# Altium PCB ECG.PcbDoc
Units mm, origin at the board's own origin, x right, y up, seen from the top; angles counter-clockwise.
Board outline 80 x 94 mm, 2 copper layers (Top Layer, Bottom Layer); 105 components, 52 nets, 276 pads, 39 vias.
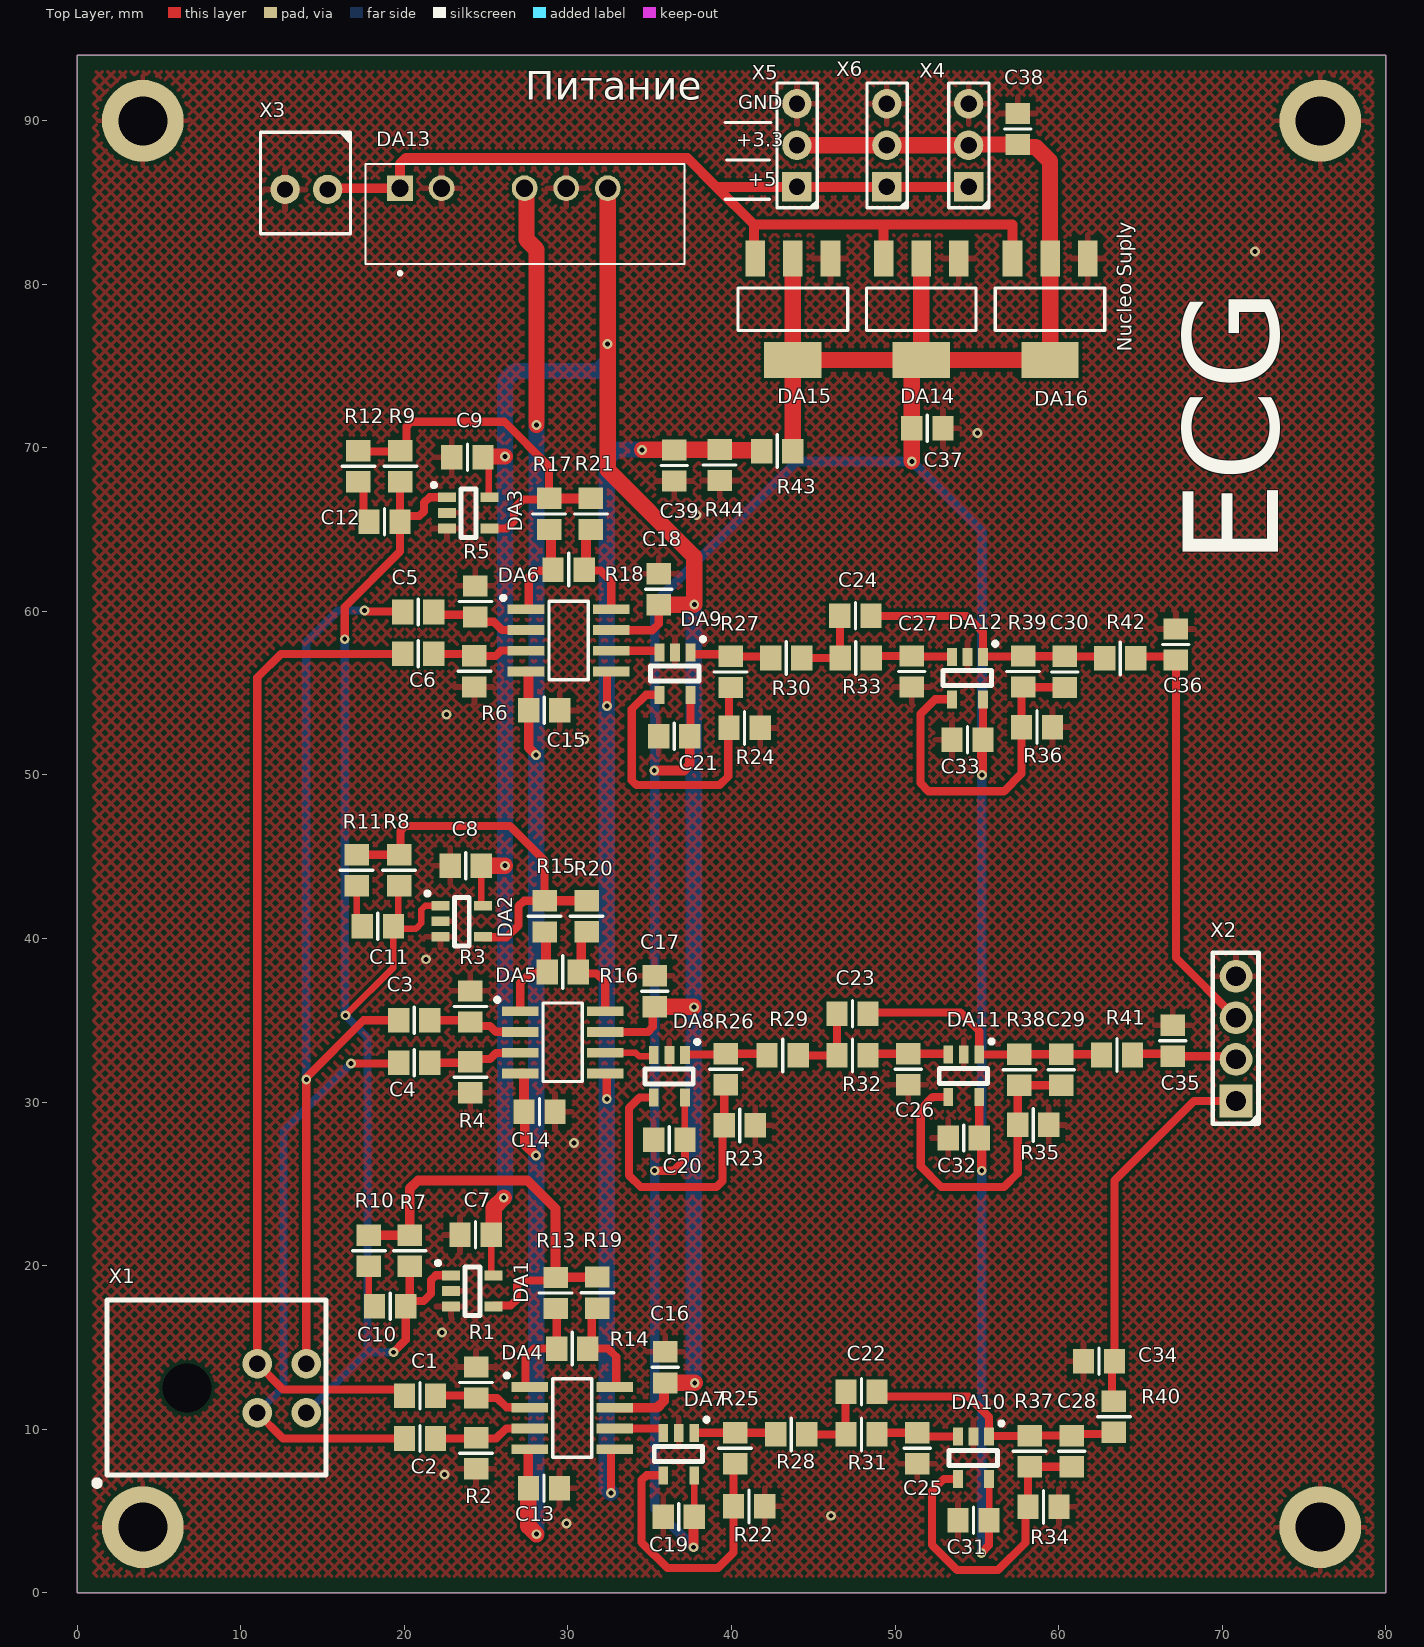
[diagram p0: Top Layer view]
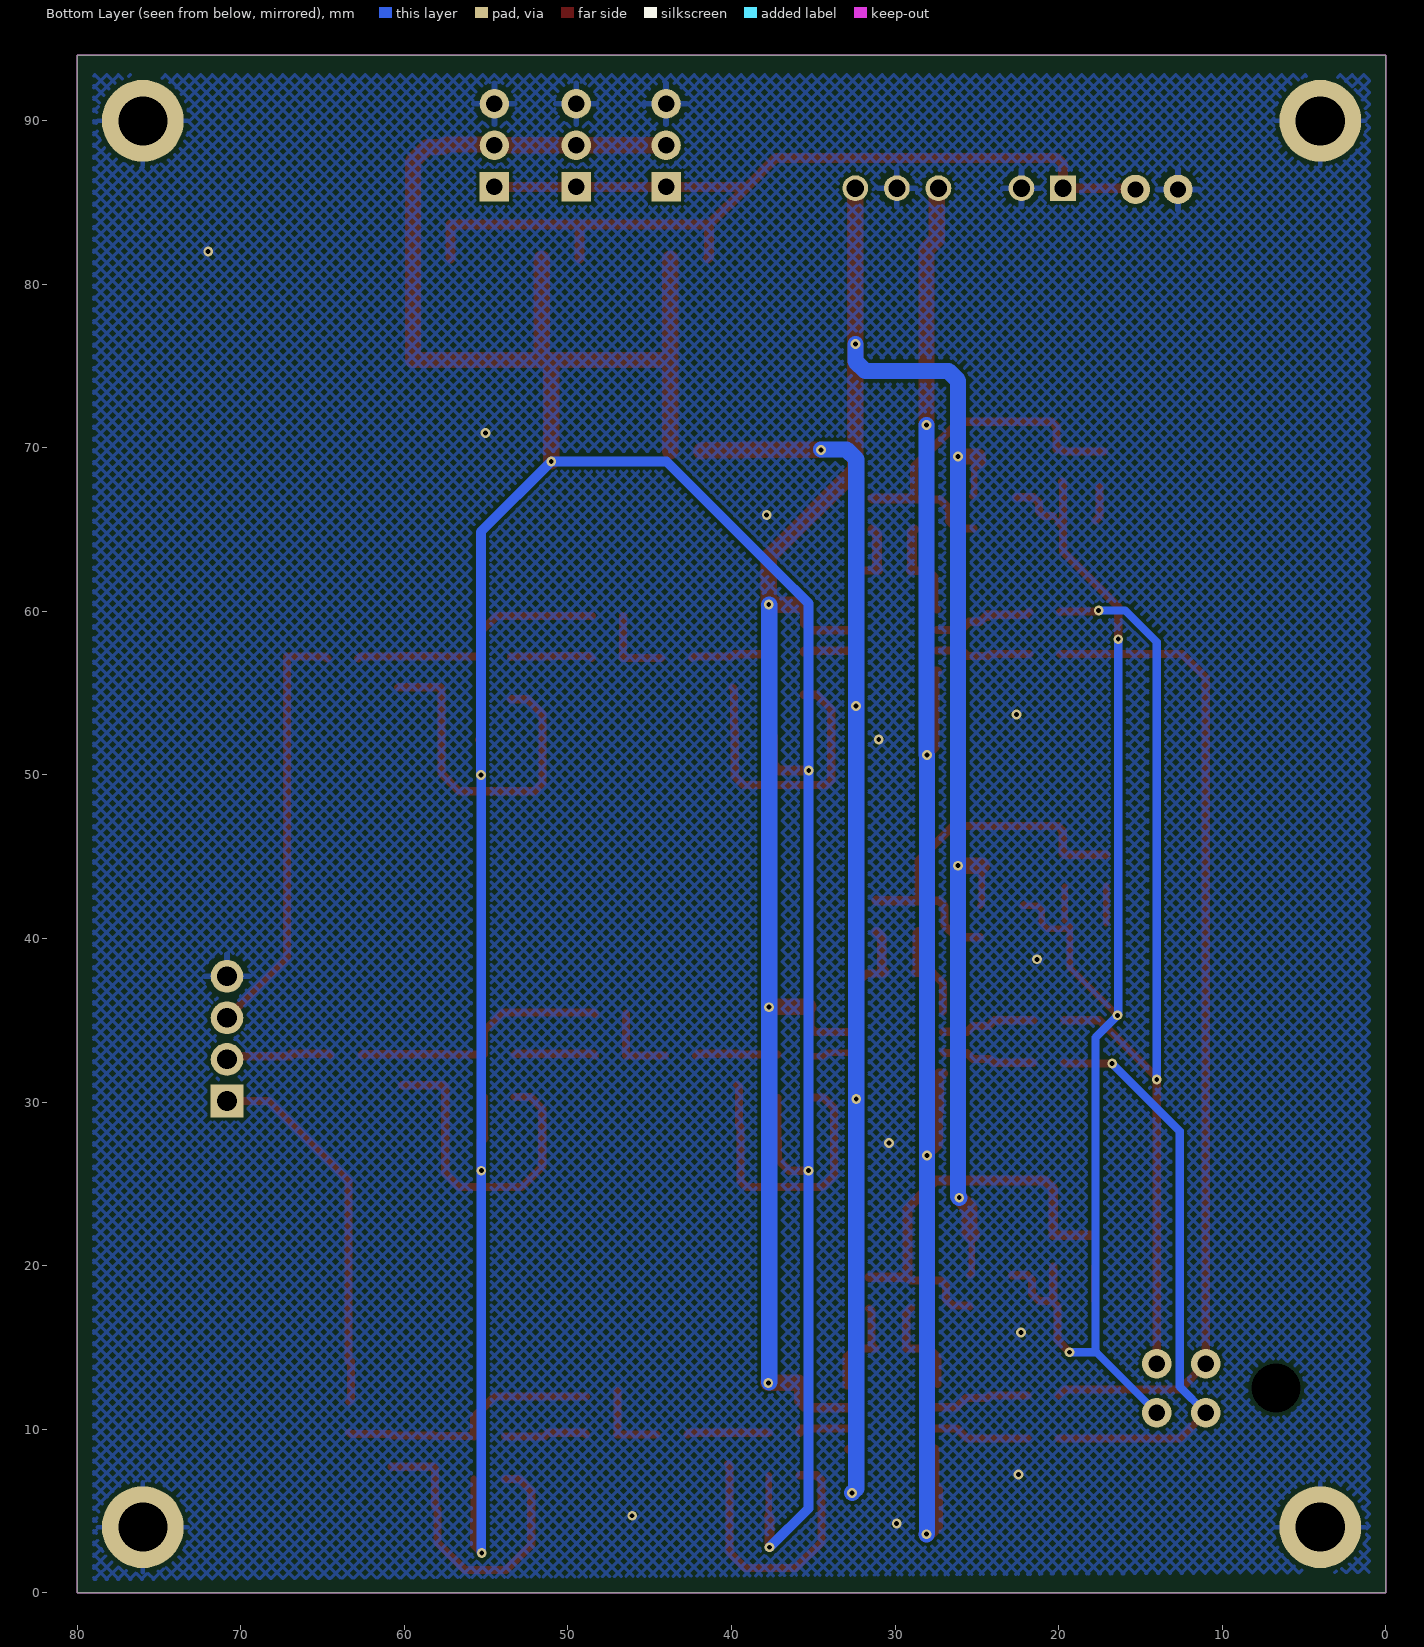
[diagram p1: Bottom Layer view, seen from below]

## Layer stack, top to bottom
Top Solder: solder mask 0.0102, Solder Resist, Dk 3.5
Top Layer: signal copper 0.0356
Dielectric 1: dielectric 0.32, FR-4, Dk 4.8
Bottom Layer: signal copper 0.0356
Bottom Solder: solder mask 0.0102, Solder Resist, Dk 3.5

## Board outline
0,94 80,94 80,0 0,0

## Design rules (kind name [scope] priority, off if disabled: settings)
AcuteAngle [All] p1: minimum=3.50000000000000E+0001 checktracksonly=FALSE
BoardOutlineClearance "BoardOutlineClearance 1" [All] p1: gap=0.25 ignorepadtopadclearanceinfootprint=FALSE except(0: Arc-SplitContinuation Track-SplitContinuation SMDPad-SplitContinuation THPad-SplitContinuation Via-SplitContinuation Fill-SplitContinuation Poly-SplitContinuation Region-SplitContinuation Text-SplitContinuation) // Milling
BoardOutlineClearance "BoardOutlineClearance 2" [All] p2: gap=0.4 ignorepadtopadclearanceinfootprint=FALSE except(0: Arc-SplitContinuation Track-SplitContinuation SMDPad-SplitContinuation THPad-SplitContinuation Via-SplitContinuation Fill-SplitContinuation Poly-SplitContinuation Region-SplitContinuation Text-SplitContinuation) // V-Cut
Clearance "Clearance 3 Oz" [All] p1: gap=0.1 ignorepadtopadclearanceinfootprint=FALSE except(0.2: Arc-Poly Track-Poly SMDPad-Poly THPad-Poly Via-Poly Fill-Poly; 0.35: Poly-Poly)
Clearance "Clearance 2 Oz" [All] p2: gap=0.1 ignorepadtopadclearanceinfootprint=FALSE except(0.2: Arc-Poly Track-Poly SMDPad-Poly THPad-Poly Via-Poly Fill-Poly; 0.35: Poly-Poly)
Clearance "Clearance-1 1 Oz" [All] p3: gap=0.2 ignorepadtopadclearanceinfootprint=FALSE except(0.25: Arc-Hole Track-Hole SMDPad-Hole THPad-Hole Via-Hole Fill-Hole Poly-Hole Region-Hole Text-Hole; 0.35: Poly-Poly) // Standart
Clearance "Clearance-2 1 Oz" [All] p4: gap=0.1 ignorepadtopadclearanceinfootprint=FALSE except(0.2: Arc-Poly Track-Poly SMDPad-Poly THPad-Poly Via-Poly Fill-Poly; 0.35: Poly-Poly) // Advance
Clearance "Clearance-1 1/2 Oz" [All] p5: gap=0.1 ignorepadtopadclearanceinfootprint=FALSE except(0.2: Arc-Poly Track-Poly SMDPad-Poly THPad-Poly Via-Poly Fill-Poly; 0.35: Poly-Poly) // Standart
Clearance "Clearance-2 1/2 Oz" [All] p6: gap=0.1 ignorepadtopadclearanceinfootprint=FALSE except(0.2: Arc-Poly Track-Poly SMDPad-Poly THPad-Poly Via-Poly Fill-Poly; 0.35: Poly-Poly) // Advance
DiffPairsRouting "DiffPairsRouting 1 Oz" [All] p1: maxlimit=0.254 minlimit=0.2 mostfreqgap=0.254 toplayer_minwidth=0.2 toplayer_maxwidth=0.381 toplayer_prefwidth=0.381 bottomlayer_minwidth=0.2 bottomlayer_maxwidth=0.381 bottomlayer_prefwidth=0.381 maxuncoupledlength=12.7
DiffPairsRouting "DiffPairsRouting 1/2 Oz" [All] p2: maxlimit=0.254 minlimit=0.1 mostfreqgap=0.254 toplayer_minwidth=0.1 toplayer_maxwidth=0.381 toplayer_prefwidth=0.381 bottomlayer_minwidth=0.1 bottomlayer_maxwidth=0.381 bottomlayer_prefwidth=0.381 maxuncoupledlength=12.7
HoleSize "Minimum HoleSize" [IsPad] p1: absolutevalues=TRUE maxlimit=5.9 minlimit=0.6 maxpercent=80.000 minpercent=20.000
HoleSize "Minimum HoleSize VIA 1" [IsVia] p2: absolutevalues=TRUE maxlimit=5.9 minlimit=0.3 maxpercent=80.000 minpercent=20.000 // Standart
HoleSize "Minimum HoleSize VIA 2" [IsVia] p3: absolutevalues=TRUE maxlimit=5.9 minlimit=0.2 maxpercent=80.000 minpercent=20.000 // Advance
HoleToHoleClearance Hole2HoleClearance [All] p1: gap=0.25 allowstackedmicrovias=FALSE
MinimumAnnularRing "Minimum AR VIA Standart" [IsVia] p1: minimumring=0.01
MinimumAnnularRing "Minimum AR PAD Standart" [IsPAD] p2: minimumring=0.01
MinimumAnnularRing "Minimum AR VIA Advance" [IsVia] p3: minimumring=0.01
MinimumAnnularRing "Minimum AR PAD Advance" [IsPAD] p4: minimumring=0.01
MinimumSolderMaskSliver "SolderMask Bridge Standart" [All] p1: minsoldermaskwidth=0.15 // All Masks
MinimumSolderMaskSliver "SolderMask Bridge Advance" [All] p2: minsoldermaskwidth=0.1 // Mask LDI
PlaneClearance "PlaneClearance 3 Oz" [All] p1: clearance=0.35
PlaneClearance "PlaneClearance 2 Oz" [All] p2: clearance=0.3
PlaneClearance "PlaneClearance 1 Oz" [All] p3: clearance=0.2
PlaneClearance "PlaneClearance-1 1/2 Oz" [All] p4: clearance=0.2 // Standart
PlaneClearance "PlaneClearance-2 1/2 Oz" [All] p5: clearance=0.15 // Advance
PlaneConnect "TermalConnect 3 Oz" [All] p1: planeconnectstyle=Relief reliefexpansion=0.2 reliefentries=4 reliefconductorwidth=0.35 reliefairgap=0.35 // Standart
PlaneConnect "TermalConnect 2 Oz" [All] p2: planeconnectstyle=Relief reliefexpansion=0.2 reliefentries=4 reliefconductorwidth=0.3 reliefairgap=0.3 // Standart
PlaneConnect "TermalConnect-1 1 Oz" [All] p3: planeconnectstyle=Relief reliefexpansion=0.2 reliefentries=4 reliefconductorwidth=0.2 reliefairgap=0.2 // Standart
PlaneConnect "TermalConnect-2 1 Oz" [All] p4: pad.planeconnectstyle=Relief pad.reliefexpansion=0.15 pad.reliefentries=4 pad.reliefconductorwidth=0.2 pad.reliefairgap=0.2 via.planeconnectstyle=Direct via.reliefexpansion=0.15 via.reliefentries=4 via.reliefconductorwidth=0.15 via.reliefairgap=0.15 // Advance
PlaneConnect "TermalConnect-1 1/2 Oz" [All] p5: planeconnectstyle=Relief reliefexpansion=0.2 reliefentries=4 reliefconductorwidth=0.2 reliefairgap=0.2 // Standart
PlaneConnect "TermalConnect-2 1/2 Oz" [All] p6: pad.planeconnectstyle=Relief pad.reliefexpansion=0.15 pad.reliefentries=4 pad.reliefconductorwidth=0.15 pad.reliefairgap=0.15 via.planeconnectstyle=Direct via.reliefexpansion=0.15 via.reliefentries=4 via.reliefconductorwidth=0.15 via.reliefairgap=0.15 // Advance
PolygonConnect "PolygonConnect 3 Oz" [All] p1: thpad.connectstyle=Relief thpad.reliefconductorwidth=0.35 thpad.reliefentries=4 thpad.polygonreliefangle="90 Angle" thpad.airgapwidth=0.35 smdpad.connectstyle=Relief smdpad.reliefconductorwidth=0.35 smdpad.reliefentries=4 smdpad.polygonreliefangle="90 Angle" smdpad.airgapwidth=0.35 via.connectstyle=Direct via.reliefconductorwidth=0.254 via.reliefentries=4 via.polygonreliefangle="90 Angle" via.airgapwidth=0.254
PolygonConnect "PolygonConnect 2 Oz" [All] p2: thpad.connectstyle=Relief thpad.reliefconductorwidth=0.3 thpad.reliefentries=4 thpad.polygonreliefangle="90 Angle" thpad.airgapwidth=0.3 smdpad.connectstyle=Relief smdpad.reliefconductorwidth=0.3 smdpad.reliefentries=4 smdpad.polygonreliefangle="90 Angle" smdpad.airgapwidth=0.3 via.connectstyle=Direct via.reliefconductorwidth=0.254 via.reliefentries=4 via.polygonreliefangle="90 Angle" via.airgapwidth=0.254
PolygonConnect "PolygonConnect-1 1 Oz" [All] p3: thpad.connectstyle=Relief thpad.reliefconductorwidth=0.2 thpad.reliefentries=4 thpad.polygonreliefangle="90 Angle" thpad.airgapwidth=0.2 smdpad.connectstyle=Relief smdpad.reliefconductorwidth=0.2 smdpad.reliefentries=4 smdpad.polygonreliefangle="90 Angle" smdpad.airgapwidth=0.2 via.connectstyle=Direct via.reliefconductorwidth=0.254 via.reliefentries=4 via.polygonreliefangle="90 Angle" via.airgapwidth=0.254 // Standart
PolygonConnect "PolygonConnect-2 1 Oz" [All] p4: thpad.connectstyle=Relief thpad.reliefconductorwidth=0.15 thpad.reliefentries=4 thpad.polygonreliefangle="90 Angle" thpad.airgapwidth=0.15 smdpad.connectstyle=Relief smdpad.reliefconductorwidth=0.15 smdpad.reliefentries=4 smdpad.polygonreliefangle="90 Angle" smdpad.airgapwidth=0.15 via.connectstyle=Direct via.reliefconductorwidth=0.254 via.reliefentries=4 via.polygonreliefangle="90 Angle" via.airgapwidth=0.254 // Advance
PolygonConnect "PolygonConnect-1 1/2 Oz" [All] p5: thpad.connectstyle=Relief thpad.reliefconductorwidth=0.15 thpad.reliefentries=4 thpad.polygonreliefangle="90 Angle" thpad.airgapwidth=0.2 smdpad.connectstyle=Relief smdpad.reliefconductorwidth=0.2 smdpad.reliefentries=4 smdpad.polygonreliefangle="90 Angle" smdpad.airgapwidth=0.2 via.connectstyle=Direct via.reliefconductorwidth=0.254 via.reliefentries=4 via.polygonreliefangle="90 Angle" via.airgapwidth=0.254 // Standart
PolygonConnect "PolygonConnect-2 1/2 Oz" [All] p6: thpad.connectstyle=Relief thpad.reliefconductorwidth=0.125 thpad.reliefentries=4 thpad.polygonreliefangle="90 Angle" thpad.airgapwidth=0.15 smdpad.connectstyle=Relief smdpad.reliefconductorwidth=0.125 smdpad.reliefentries=4 smdpad.polygonreliefangle="90 Angle" smdpad.airgapwidth=0.15 via.connectstyle=Direct via.reliefconductorwidth=0.254 via.reliefentries=4 via.polygonreliefangle="90 Angle" via.airgapwidth=0.254 // Advance
RoutingCorners [All] p1 off: cornerstyle=45-Degree minsetback=2.54 maxsetback=2.54
RoutingVias [All] p1: holewidth=0.3 width=0.6 viastyle="Through Hole" minholewidth=0.2 minwidth=0.4 maxholewidth=5.9 maxwidth=6.4
SilkToSilkClearance Silk2SilkClearance [All] p1 off: silktosilkclearance=0.15
SilkToSolderMaskClearance Silk2SolderMaskClearance [IsPad] p1 off: minsilkscreentomaskgap=0.15 clearancetoexposedcopper=TRUE
SolderMaskExpansion SolderMaskExpansion-1 [All] p1: expansion=0.05 istentingtop=FALSE // Standart
SolderMaskExpansion "SolderMaskExpansion LDI" [All] p2: expansion=0.025 istentingtop=FALSE // Advance
UnRoutedNet [All] p1: checkbadconnections=TRUE
Width "Width 3 Oz" [All] p1: maxlimit=10 minlimit=0.1 preferedwidth=0.4 checkconnectedcopper=TRUE
Width "Width 2 Oz" [All] p2: maxlimit=10 minlimit=0.1 preferedwidth=0.35 minimp=50.000000 maximp=50.000000 favimp=50.000000 checkconnectedcopper=TRUE
Width "Width 1 Oz" [All] p3: maxlimit=10 minlimit=0.1 preferedwidth=0.2 checkconnectedcopper=TRUE
Width "Width 1/2 Oz" [All] p4: maxlimit=10 minlimit=0.1 preferedwidth=0.125 checkconnectedcopper=TRUE
20 further rules are at their usual default settings.

## Classes and differential pairs
component class POWER: C37 C38 C39 DA13 DA14 DA15 DA16 R43 R44 X4 X5 X6
component class ECG_mesurment_2: C1 C2 C3 C4 C5 C6 C7 C8 C9 C10 C11 C12 C13 C14 C15 C16 C17 C18 C19 C20 C21 C22 C23 C24 C25 C26 C27 C28 C29 C30 C31 C32 C33 C34 C35 C36 DA1 DA2 DA3 DA4 DA5 DA6 DA7 DA8 DA9 DA10 DA11 DA12 R1 R2 R3 R4 R5 R6 R7 R8 R9 R10 R11 R12 R13 R14 R15 R16 R17 R18 R19 R20 R21 R22 R23 R24 R25 R26 R27 R28 R29 R30 R31 R32 R33 R34 R35 R36 R37 R38 R39 R40 R41 R42 X1 X2 X3

## Components (designator, comment, footprint, x,y, rotation, side; value= is the part's Value field where it differs from the comment)
C1 "0.1u" "CAP: SMD 0805 MD IPC 782" 20.95,12.051 r180 top
C2 "0.1u" "CAP: SMD 0805 MD IPC 782" 20.95,9.425 r180 top
C3 "0.1u" "CAP: SMD 0805 MD IPC 782" 20.603,34.999 r180 top
C4 "0.1u" "CAP: SMD 0805 MD IPC 782" 20.6,32.4 r180 top
C5 "0.1u" "CAP: SMD 0805 MD IPC 782" 20.847,59.962 r180 top
C6 "0.1u" "CAP: SMD 0805 MD IPC 782" 20.847,57.4 r180 top
C7 "0.1u 50V 0805 ±10%" "CAP: SMD 0805 MD IPC 782" 24.35,21.875 r180 top
C8 "0.1u 50V 0805 ±10%" "CAP: SMD 0805 MD IPC 782" 23.75,44.45 r180 top
C9 "0.1u 50V 0805 ±10%" "CAP: SMD 0805 MD IPC 782" 23.85,69.425 r180 top
C10 "6.8n 50V 0805 ±5%" "CAP: SMD 0805 MD IPC 782" 19.125,17.5 r0 top
C11 "6.8n 50V 0805 ±5%" "CAP: SMD 0805 MD IPC 782" 18.375,40.75 r0 top
C12 "6.8n 50V 0805 ±5%" "CAP: SMD 0805 MD IPC 782" 18.777,65.477 r0 top
C13 "0.1u 50V 0805 ±10%" "CAP: SMD 0805 MD IPC 782" 28.53,6.374 r0 top
C14 "0.1u 50V 0805 ±10%" "CAP: SMD 0805 MD IPC 782" 28.261,29.403 r0 top
C15 "0.1u 50V 0805 ±10%" "CAP: SMD 0805 MD IPC 782" 28.543,53.944 r0 top
C16 "0.1u 50V 0805 ±10%" "CAP: SMD 0805 MD IPC 782" 35.943,13.775 r90 top
C17 "0.1u 50V 0805 ±10%" "CAP: SMD 0805 MD IPC 782" 35.297,36.778 r90 top
C18 "0.1u 50V 0805 ±10%" "CAP: SMD 0805 MD IPC 782" 35.55,61.35 r90 top
C19 "0.1u 50V 0805 ±10%" "CAP: SMD 0805 MD IPC 782" 36.775,4.65 r180 top
C20 "0.1u 50V 0805 ±10%" "CAP: SMD 0805 MD IPC 782" 36.2,27.7 r180 top
C21 "0.1u 50V 0805 ±10%" "CAP: SMD 0805 MD IPC 782" 36.5,52.375 r180 top
C22 "0.01u 50V 0805 ±5%" "CAP: SMD 0805 MD IPC 782" 47.95,12.275 r180 top
C23 "0.01u 50V 0805 ±5%" "CAP: SMD 0805 MD IPC 782" 47.4,35.4 r180 top
C24 "0.01u 50V 0805 ±5%" "CAP: SMD 0805 MD IPC 782" 47.575,59.725 r180 top
C25 "0.01u 50V 0805 ±5%" "CAP: SMD 0805 MD IPC 782" 51.35,8.825 r270 top
C26 "0.1u 50V 0805 ±10%" "CAP: SMD 0805 MD IPC 782" 50.8,32 r90 top
C27 "0.1u 50V 0805 ±10%" "CAP: SMD 0805 MD IPC 782" 51.025,56.325 r90 top
C28 "0.01u 50V 0805 ±5%" "CAP: SMD 0805 MD IPC 782" 60.8,8.65 r270 top
C29 "0.1u 50V 0805 ±10%" "CAP: SMD 0805 MD IPC 782" 60.15,31.975 r270 top
C30 "0.1u 50V 0805 ±10%" "CAP: SMD 0805 MD IPC 782" 60.375,56.3 r270 top
C31 "0.1u 50V 0805 ±10%" "CAP: SMD 0805 MD IPC 782" 54.8,4.425 r180 top
C32 "0.1u 50V 0805 ±10%" "CAP: SMD 0805 MD IPC 782" 54.2,27.8 r180 top
C33 "0.1u 50V 0805 ±10%" "CAP: SMD 0805 MD IPC 782" 54.425,52.15 r180 top
C34 "0.1u 50V 0805 ±10%" "CAP: SMD 0805 MD IPC 782" 62.475,14.15 r180 top
C35 "0.1u 50V 0805 ±10%" "CAP: SMD 0805 MD IPC 782" 66.975,33.75 r90 top
C36 "0.1u 50V 0805 ±10%" "CAP: SMD 0805 MD IPC 782" 67.175,57.975 r90 top
C37 "0.1u 50V 0805 ±10%" "CAP: SMD 0805 MD IPC 782" 51.975,71.2 r0 top
C38 "0.1u 50V 0805 ±10%" "CAP: SMD 0805 MD IPC 782" 57.5,89.5 r90 top
C39 "0.1u 50V 0805 ±10%" "CAP: SMD 0805 MD IPC 782" 36.5,68.925 r270 top
DA1 "OPA189IDBVR" "IC: SOT 23 5pin" 24.15,18.45 r0 top
DA2 "OPA189IDBVR" "IC: SOT 23 5pin" 23.5,41.05 r0 top
DA3 "OPA189IDBVR" "IC: SOT 23 5pin" 23.9,66.025 r0 top
DA4 "AD620" "IC: SOIC 8" 30.261,10.675 r0 top
DA5 "AD620" "IC: SOIC 8" 29.678,33.65 r0 top
DA6 "AD620" "IC: SOIC 8" 30.041,58.224 r0 top
DA7 "TLV9101" "IC: SOT 23 5pin" 36.775,8.475 r270 top
DA8 "TLV9101" "IC: SOT 23 5pin" 36.2,31.575 r270 top
DA9 "TLV9101" "IC: SOT 23 5pin" 36.55,56.2 r270 top
DA10 "TLV9101" "IC: SOT 23 5pin" 54.8,8.25 r270 top
DA11 "TLV9101" "IC: SOT 23 5pin" 54.2,31.6 r270 top
DA12 "TLV9101" "IC: SOT 23 5pin" 54.425,55.925 r270 top
DA13 "DPU01L-12" SIP-6 27.35,84.1 r0 top
DA14 "AMS 1117-3.3" "IC: SOT 223" 51.6,78.475 r270 top
DA15 "AMS 1117-3.3" "IC: SOT 223" 43.75,78.475 r270 top
DA16 "AMS 1117-3.3" "IC: SOT 223" 59.48,78.475 r270 top
R1 "75k ±1% 0805" "RES: SMD 0805 MD IPC 782" 24.381,12.853 r270 top
R2 "75k ±1% 0805" "RES: SMD 0805 MD IPC 782" 24.381,8.523 r90 top
R3 "75k ±1% 0805" "RES: SMD 0805 MD IPC 782" 24.031,35.846 r270 top
R4 "75k ±1% 0805" "RES: SMD 0805 MD IPC 782" 24.027,31.517 r90 top
R5 "75k ±1% 0805" "RES: SMD 0805 MD IPC 782" 24.337,60.61 r270 top
R6 "75k ±1% 0805" "RES: SMD 0805 MD IPC 782" 24.282,56.332 r90 top
R7 "1M ±1% 0805" "RES: SMD 0805 MD IPC 782" 20.325,20.9 r90 top
R8 "1M ±1% 0805" "RES: SMD 0805 MD IPC 782" 19.675,44.175 r90 top
R9 "1M ±1% 0805" "RES: SMD 0805 MD IPC 782" 19.75,68.875 r90 top
R10 "10k ±1% 0805" "RES: SMD 0805 MD IPC 782" 17.825,20.9 r90 top
R11 "10k ±1% 0805" "RES: SMD 0805 MD IPC 782" 17.075,44.175 r90 top
R12 "10k ±1% 0805" "RES: SMD 0805 MD IPC 782" 17.177,68.877 r90 top
R13 "20k ±1% 0805" "RES: SMD 0805 MD IPC 782" 29.238,18.32 r90 top
R14 "1k ±1% 0805" "RES: SMD 0805 MD IPC 782" 30.266,14.923 r0 top
R15 "20k ±1% 0805" "RES: SMD 0805 MD IPC 782" 28.566,41.352 r90 top
R16 "1k ±1% 0805" "RES: SMD 0805 MD IPC 782" 29.678,37.95 r0 top
R17 "20k ±1% 0805" "RES: SMD 0805 MD IPC 782" 28.846,65.962 r90 top
R18 "1k ±1% 0805" "RES: SMD 0805 MD IPC 782" 30.041,62.548 r0 top
R19 "20k ±1% 0805" "RES: SMD 0805 MD IPC 782" 31.8,18.344 r270 top
R20 "20k ±1% 0805" "RES: SMD 0805 MD IPC 782" 31.141,41.363 r270 top
R21 "20k ±1% 0805" "RES: SMD 0805 MD IPC 782" 31.394,65.962 r270 top
R22 "100k ±1% 0805" "RES: SMD 0805 MD IPC 782" 41.075,5.275 r0 top
R23 "100k ±1% 0805" "RES: SMD 0805 MD IPC 782" 40.5,28.575 r0 top
R24 "100k ±1% 0805" "RES: SMD 0805 MD IPC 782" 40.8,52.875 r0 top
R25 "100k ±1% 0805" "RES: SMD 0805 MD IPC 782" 40.225,8.825 r90 top
R26 "100k ±1% 0805" "RES: SMD 0805 MD IPC 782" 39.65,32 r90 top
R27 "100k ±1% 0805" "RES: SMD 0805 MD IPC 782" 39.95,56.3 r90 top
R28 "27k ±1% 0805" "RES: SMD 0805 MD IPC 782" 43.65,9.675 r0 top
R29 "27k ±1% 0805" "RES: SMD 0805 MD IPC 782" 43.125,32.85 r0 top
R30 "27k ±1% 0805" "RES: SMD 0805 MD IPC 782" 43.35,57.15 r0 top
R31 "27k ±1% 0805" "RES: SMD 0805 MD IPC 782" 47.95,9.675 r0 top
R32 "27k ±1% 0805" "RES: SMD 0805 MD IPC 782" 47.4,32.85 r0 top
R33 "27k ±1% 0805" "RES: SMD 0805 MD IPC 782" 47.6,57.15 r0 top
R34 "100k ±1% 0805" "RES: SMD 0805 MD IPC 782" 59.075,5.25 r0 top
R35 "100k ±1% 0805" "RES: SMD 0805 MD IPC 782" 58.45,28.6 r0 top
R36 "100k ±1% 0805" "RES: SMD 0805 MD IPC 782" 58.675,52.925 r0 top
R37 "10k ±1% 0805" "RES: SMD 0805 MD IPC 782" 58.225,8.65 r90 top
R38 "100k ±1% 0805" "RES: SMD 0805 MD IPC 782" 57.6,31.975 r90 top
R39 "100k ±1% 0805" "RES: SMD 0805 MD IPC 782" 57.825,56.325 r90 top
R40 "75k ±1% 0805" "RES: SMD 0805 MD IPC 782" 63.375,10.75 r90 top
R41 "75k ±1% 0805" "RES: SMD 0805 MD IPC 782" 63.575,32.875 r0 top
R42 "75k ±1% 0805" "RES: SMD 0805 MD IPC 782" 63.775,57.125 r0 top
R43 "1k ±1% 0805" "RES: SMD 0805 MD IPC 782" 42.8,69.8 r0 top
R44 "1k ±1% 0805" "RES: SMD 0805 MD IPC 782" 39.275,68.95 r90 top
X1 "Micro-Fit 3.0 43045-0401" "CON: 4pin Molex MicroFit 3.0 43045-0401" 7,12.5 r270 top
X2 "PLS-4" "CON: 4pin PLS-4" 70.85,33.875 r90 top
X3 "WF-2" "CON: 2pin wf-2" 14,86.3 r180 top
X4 "PLS-3" "CON: 3pin PLS-3" 54.5,88.5 r90 top
X5 "PLS-3" "CON: 3pin PLS-3" 44,88.5 r90 top
X6 "PLS-3" "CON: 3pin PLS-3" 49.5,88.5 r90 top

## Footprints (in the part's own frame and the unit in brackets; to place one, negate y for a bottom-side part, rotate by r counter-clockwise, add the part's x,y. Pads: shape width x height; smd on the part's side, far side on the other; paste and mask are expansions set on the pad)
"CAP: SMD 0805 MD IPC 782" [mm]
  rect 1.3x1.5 smd: 1(-0.95,0) 2(0.95,0)
  silkscreen extent 0,-0.8 0,0.8, body extent -1.4,-0.63 1.4,0.63, height 0.8
"CON: 2pin wf-2" [mm]
  round 1.8 hole 1: 1(-1.3,0.5) 2(1.3,0.5)
  silkscreen extent -2.7,-3 2.8,3.2, body extent -2.49,-2.8 2.59,3, height 11.56
"CON: 3pin PLS-3" [mm]
  rect 1.8x1.8 hole 1: 1(-2.54,0)
  round 1.8 hole 1: 2(0,0) 3(2.54,0)
  silkscreen extent -3.81,-1.24 3.81,1.22, body extent -3.81,-1.27 3.81,1.27, height 8.6
"CON: 4pin Molex MicroFit 3.0 43045-0401" [mm]
  round 1.8 hole 1: 1(1.5,4) 2(-1.5,4) 3(1.5,7) 4(-1.5,7)
  round 0 hole 3: ""(0,-0.3)
  silkscreen extent -5.4,-5.9 5.9,8.2, body extent -5.07,-4.95 5.07,7.29, height 8.83
"CON: 4pin PLS-4" [mm]
  rect 2x2 hole 1.2: 1(-3.81,0)
  round 2 hole 1.2: 2(-1.27,0) 3(1.27,0) 4(3.81,0)
  silkscreen extent -5.21,-1.39 5.25,1.42, body extent -5.08,-1.3 5.08,1.3, height 7.83
"IC: SOIC 8" [mm]
  rect 2.25x0.6 smd: 1(-2.6,1.905) 2(-2.6,0.635) 3(-2.6,-0.635) 4(-2.6,-1.905) 5(2.6,-1.905) 6(2.6,-0.635) 7(2.6,0.635) 8(2.6,1.905)
  silkscreen extent -4.1,-2.4 1.2,2.7, body extent -3.05,-2.45 2.95,2.45, height 1.75
"IC: SOT 23 5pin" [mm]
  rect 1.1x0.6 smd: 1(-1.3,0.95) 2(-1.3,0) 3(-1.3,-0.95) 4(1.3,-0.95) 5(1.3,0.95)
  silkscreen extent -2.2,-1.5 0.46,1.8, body extent -1.5,-1.5 1.5,1.5, height 1.3
"IC: SOT 223" [mm]
  rect 2.2x1.2 smd: 1(-3.1,2.3) 2(-3.1,0) 3(-3.1,-2.3)
  rect 2.2x3.5 smd: 4(3.1,0)
  silkscreen extent -1.3,-3.35 1.3,3.35, body extent -3.48,-3.25 3.48,3.25, height 1.9
"RES: SMD 0805 MD IPC 782" [mm]
  rect 1.3x1.5 smd: 1(-0.95,0) 2(0.95,0)
  silkscreen extent 0,-1 0,1, body extent -1.4,-0.62 1.4,0.63, height 0.8
SIP-6 [mm]
  rect 1.575x1.575 hole 1.05: 1(-7.62,1.778)
  round 1.575 hole 1.05: 2(-5.08,1.778) 4(0,1.778) 5(2.54,1.778) 6(5.08,1.778)
  silkscreen extent -9.72,-3.52 9.78,3.25

## Part data
C1 C2 C3 C4 C5 C6: library part "0.1u 50V 0805 ±10%", Code=6279254871, Name="Конденсатор X7R 50V 0,1uF ±10% 0805"
DA13: library part "DC-DC: +12/-12V DPU01L-12", Code=6339113551, Name="Микросхема AM2D-0512DZ, AIMTEC"
DA14 DA15 DA16: library part "LDO: 15-3.3V AMS1117", Code=6339112951, Name="Микросхема AMS-1117-3.3"
X1: library part "4 pin MicroFit DR R Molex"
X2: library part "4 pin PLS-4", Code=6313932041, Name="Вилка WF-4"
X3: library part "2 pin WF-2", Code=6313952902, Name="Вилка WF-2"
X4 X5 X6: library part "3 in PLS 3", Code=6313952321, Name="Вилка PLS-2"
C7 C8 C9 C13 C14 C15 C16 C17 C18 C19 C20 C21 C26 C27 C29 C30 C31 C32 C33 C34 C35 C36 C37 C38 C39: Code=6279254871, Name="Конденсатор X7R 50V 0,1uF ±10% 0805"
C10 C11 C12: Code=6279352311, Name="Конденсатор NPO 50V 6800pF ±5% 0805"
C22 C23 C24 C25 C28: Code=6279261451, Name="Конденсатор X7R 50V  0,01uF±5%  0805"
DA1 DA2 DA3: Name="Микросхема OPA189IDBVR"
DA7 DA8 DA9 DA10 DA11 DA12: Code=6339115821, Name="Микросхема TLV9101IDBVR"
R1 R2 R3 R4 R5 R6 R40 R41 R42: Name="Резистор 75К±1% 0805"
R7 R8 R9: Name="Резистор RC0805FR-071KL, Yageo"
R10 R11 R12 R37: Code=6020003061, Name="Резистор RC0805JR-0710KL"
R13 R15 R17 R19 R20 R21: Code=6094357581, Name="Резистор 20K±1% 0805"
R14 R16 R18 R43 R44: Code=6027158691, Name="Резистор RC0805FR-071KL, Yageo"
R22 R23 R24 R25 R26 R27 R34 R35 R36 R38 R39: Code=6094357811, Name="Резистор 100K±1% 0805"
R28 R29 R30 R31 R32 R33: Name="Резистор 27k±1% 0805"

## Free pads (board coordinates)
  round 5 hole 3: 3(4,4) 3(4,90) 3(76,4) 3(76,90)

## Via types
v1: diameter 0.6, hole 0.3, Top Layer to Bottom Layer, 39 vias

## Nets (pads, with @x,y where several pads share a name; then routed paths per layer and width w, separated by ;. In a path a pad name is that pad's centre, name@x,y a point inside that pad or via, vN(x,y) a via of type N, cw(c..) or ccw(c..) an arc to the next point about the centre after c; other vN are vias at no path point)
+3.3: C19.1 C20.1 C21.1 C31.1 C32.1 C33.1 C37.1 C38.1 DA7.5 DA8.5 DA9.5 DA10.5 DA11.5 DA12.5 DA14.2 DA14.4 DA15.2 DA15.4 DA16.2 DA16.4 R43.2 X4.2 X5.2 X6.2 | length 245.3
  Top Layer w0.4: C20.1 DA8.5 ; C19.1 DA7.5 ; C31.1 DA10.5
  Top Layer w0.5: v1(35.3,25.8) 36.475,25.8 37.15,26.475 C20.1 ; C21.1 37.5,52.425 DA9.5 ; C32.1 DA11.5 ; v1(55.275,2.425) 55.75,2.9 C31.1 ; C33.1 DA12.5
  Top Layer w0.6: v1(35.275,50.275) 37.099,50.275 37.45,50.626 C21.1 ; v1(37.675,2.775) 37.675,4.6 C19.1 ; C32.1 55.3,27.65 v1(55.3,25.8) ; v1(55.325,50) 55.325,52.1 C33.1
  Top Layer w1: R43.2 DA15.4 ; DA15.2 DA15.4 ; X5.2 X6.2 X4.2 ; v1(51.025,69.175) C37.1 DA14.4@51.025,75.375 ; DA14.2 DA14.4 ; X4.2@54.5,88.55 C38.1 ; C38.1@57.5,88.552 57.652,88.4 58.6,88.4 59.473,87.527 DA16.2@59.473,81.615 ; DA16.2 DA16.4 DA14.4 ; DA15.4 DA14.4@51.025,75.375 ; DA14.4@51.025,75.375 DA14.4
  Bottom Layer w0.6: v1(37.675,2.775) 35.3,5.15 v1(35.3,25.8) 35.3,60.5 37.15,62.35 43.975,69.175 v1(51.025,69.175) 55.325,64.875 v1(55.325,50) 55.3,49.975 v1@55.3,2.487
+5: DA13.1 DA14.3 DA15.3 DA16.3 X3.1 X4.1 X5.1 X6.1 | length 66.8
  Top Layer w0.6: X3.1@15.25,85.878 DA13.1 19.73,87.374 20.081,87.725 37.3,87.725 39.065,85.96 ; DA15.3 41.375,81.65 41.375,83.65 ; DA14.3 49.3,83.65 ; X4.1 X5.1 39.065,85.96 ; DA16.3 57.18,83.55 ; 57.18,83.65 49.3,83.65 ; 39.065,85.96 41.375,83.65 ; 41.375,83.65 49.3,83.65
+12: C7.1 C8.1 C9.1 C16.1 C17.1 C18.1 DA1.5 DA2.5 DA3.5 DA4.7 DA5.7 DA6.7 DA13.6 | length 165
  Top Layer w0.4: C8.1 24.7,42.1 DA2.5 ; C9.1@25.148,69.2 25.148,67.152 25.248,67.052 DA3.5@25.277,67.052 ; C7.1 25.3,19.5 25.4,19.4 DA1.5
  Top Layer w0.5: DA5.7 34.892,34.285 35.185,34.578 C17.1@35.185,35.716 ; DA6.7@32.65,58.85 35.175,58.85 35.55,59.225 C18.1
  Top Layer w0.6: DA4.7@32.864,11.31 33.861,11.31 33.865,11.307 35.459,11.307 35.869,11.717 C16.1@35.869,12.788
  Top Layer w1: C8.1 v1(26.15,44.45) ; C9.1@24.95,69.2 24.95,69.475 v1(26.15,69.475) ; C7.1 25.45,22.025 25.45,23.525 v1(26.075,24.15) ; DA13.6@32.425,85.986 v1(32.425,76.35) 32.425,68.65 37.725,63.35 v1(37.725,60.425) 37.7,60.4 C18.1 ; C17.1 v1@37.672,35.828 ; C16.1@35.869,12.788 35.906,12.825 v1(37.75,12.825)
  Bottom Layer w1: v1(26.075,24.15) 26.15,24.225 v1(26.15,44.45) v1(26.15,69.475) 26.15,74.114 26.736,74.7 31.831,74.7 32.417,75.286 v1@32.417,76.342 ; v1@37.7,12.875 v1@37.7,60.4
  other v1: 37.7,35.8
-12: C13.1 C14.1 C15.1 DA4.4 DA5.4 DA6.4 DA13.4 | length 99
  Top Layer w0.6: DA5.4 27.311,31.745 C14.1 27.355,29.358 27.355,27.42 v1(28.05,26.725) ; DA6.4 27.593,56.319 C15.1 27.597,53.94 27.597,51.678 v1(28.05,51.225) ; C13.1@27.573,6.382 27.573,8.77 DA4.4
  Top Layer w1: DA13.4 27.46,85.768 27.46,82.74 28.075,82.125 v1(28.075,71.4) ; C13.1@27.58,6.305 27.58,4.07 v1(28.075,3.575)
  Bottom Layer w1: v1(28.05,51.225) 28.05,3.6 v1(28.075,3.575) ; v1@28.075,51.25 v1(28.075,71.4)
GND: C7.2 C8.2 C9.2 C13.2 C14.2 C15.2 C16.2 C17.2 C18.2 C19.2 C20.2 C21.2 C25.2 C26.1 C27.1 C31.2 C32.2 C33.2 C34.2 C35.2 C36.2 C37.2 C38.2 C39.2 DA1.2 DA1.3 DA2.2 DA2.3 DA3.2 DA3.3 DA7.2 DA8.2 DA9.2 DA10.2 DA11.2 DA12.2 DA13.2 DA13.5 DA14.1 DA15.1 DA16.1 pad.3 R1.1 R2.1 R3.1 R4.1 R5.1 R6.1 R22.2 R23.2 R24.2 R34.2 R35.2 R36.2 R44.1 X2.4 X3.2 X4.3 X5.3 X6.3
  other v1: 29.9,4.225 46.075,4.7 22.45,7.225 22.3,15.9 30.375,27.5 21.325,38.725 31,52.175 22.575,53.7 37.85,65.9 55.05,70.9 72,82
LA: C1.2 C6.2 X1.2 | length 61.3
  Top Layer w0.5: C6.2 12.45,57.4 11,55.95 X1.2 12.575,12.425 19.626,12.425 C1.2
LL: C3.2 C5.2 X1.4 | length 58.1
  Top Layer w0.5: X1.4 14,31.5 17.5,35 19.652,35 C3.2 ; v1(17.55,60.05) 17.577,60.05 17.627,60 19.859,60 C5.2
  Bottom Layer w0.5: v1(14,31.375) 14,58.125 15.925,60.05 v1(17.55,60.05)
NetC1_1: C1.1 DA4.2 R1.2 | length 5.9
  Top Layer w0.5: C1.1 R1.2@24.232,12.051 ; R1.2 25.666,11.903 26.233,11.336 27.635,11.336 DA4.2
NetC2_1: C2.1 DA4.3 R2.2 | length 8.4
  Top Layer w0.5: R2.2@24.333,9.425 C2.1 25.61,9.425 26.225,10.04 DA4.3
NetC3_1: C3.1 DA5.2 R3.2 | length 5.8
  Top Layer w0.3: R3.2@23.927,34.999 R3.2
  Top Layer w0.5: C3.1 R3.2@23.927,34.999 ; R3.2 24.273,34.654 25.238,34.654 25.599,34.292 27.07,34.292 DA5.2
NetC4_1: C4.1 DA5.3 R4.2 | length 5.8
  Top Layer w0.3: R4.2@23.96,32.4 R4.2
  Top Layer w0.5: C4.1 R4.2@23.96,32.4 ; R4.2 24.195,32.634 25.234,32.634 25.603,33.003 26.997,33.003 DA5.3@27.043,33.049
NetC5_1: C5.1 DA6.2 R5.2 | length 6.2
  Top Layer w0.5: C5.1 21.959,59.8 24.15,59.8 R5.2@24.3,59.65 ; R5.2@24.347,59.85 24.347,59.815 24.8,59.362 25.473,59.362 25.966,58.869 27.431,58.869 DA6.2
NetC6_1: C6.1 DA6.3 R6.2 | length 5.8
  Top Layer w0.3: R6.2@24.164,57.4 R6.2 ; DA6.3@27.43,57.6 DA6.3
  Top Layer w0.5: C6.1 R6.2@24.164,57.4 ; R6.2 25.582,57.282 25.9,57.6 DA6.3@27.43,57.6
NetC10_1: C10.1 R10.1 | length 2.1
  Top Layer w0.4: C10.1@17.825,17.85 R10.1
NetC11_1: C11.1 R11.1 | length 2.3
  Top Layer w0.4: C11.1@17.075,40.925 R11.1
NetC12_1: C12.1 R12.1 | length 2.2
  Top Layer w0.5: R12.1@17.5,67.605 17.5,65.805 C12.1@17.75,65.555
NetC22_1: C22.1 C28.1 DA10.1 R37.2 R40.1 | length 16.4
  Top Layer w0.5: C22.1@48.9,12 54.5,12 55.75,10.75 DA10.1 55.775,9.575 58.2,9.575 R37.2 ; R37.2@58.275,9.65 R37.2 ; R40.1 63.275,9.7 60.9,9.7 C28.1 R37.2
NetC22_2: C22.2 R28.2 R31.1 | length 5.1
  Top Layer w0.5: R28.2 R31.1 46.962,9.713 C22.2@46.962,12.312
NetC23_1: C23.1 C29.1 DA11.1 R38.2 R41.1 | length 16.2
  Top Layer w0.5: C23.1 48.425,35.475 54,35.475 55.15,34.325 DA11.1 55.162,32.913 57.587,32.913 R38.2 C29.1 62.575,32.925 R41.1
NetC23_2: C23.2 R29.2 R32.1 | length 4.9
  Top Layer w0.5: R29.2 R32.1 C23.2
NetC24_1: C24.1 C30.1 DA12.1 R39.2 R42.1 | length 16.3
  Top Layer w0.5: C24.1 54.375,59.725 55.375,58.725 DA12.1 55.4,57.25 57.8,57.25 R39.2 57.837,57.262 60.362,57.262 C30.1 62.7,57.25 R42.1
NetC24_2: C24.2 R30.2 R33.1 | length 4.9
  Top Layer w0.5: R30.2 R33.1 46.637,57.162 46.637,59.712 C24.2
NetC25_1: C25.1 DA10.3 R31.2 | length 5.1
  Top Layer w0.5: R31.2 49,9.775 51.225,9.775 51.45,9.55 DA10.3
NetC26_2: C26.2 DA11.3 R32.2 | length 5
  Top Layer w0.5: R32.2 48.45,32.95 C26.2 53.2,32.95 DA11.3
NetC27_2: C27.2 DA12.3 R33.2 | length 5
  Top Layer w0.5: R33.2 48.675,57.275 C27.2 51.05,57.25 53.45,57.25 DA12.3
NetC28_2: C28.2 DA10.4 R34.1 R37.1 | length 19.6
  Top Layer w0.5: DA10.4 52.975,6.95 52.25,6.225 52.25,2.925 53.8,1.375 56.3,1.375 57.975,3.05 57.975,5.1 R34.1 58.125,7.6 R37.1 C28.2
NetC29_2: C29.2 DA11.4 R35.1 R38.1 | length 20.3
  Top Layer w0.5: DA11.4 52.3,30.3 51.575,29.575 51.575,26.05 52.825,24.8 56.657,24.8 57.5,25.643 R35.1 57.5,30.925 R38.1 C29.2
NetC30_2: C30.2 DA12.4 R36.1 R39.1 | length 21.3
  Top Layer w0.5: DA12.4 52.45,54.625 51.55,53.725 51.55,49.5 52.05,49 56.65,49 57.725,50.075 R36.1 57.725,55.275 R39.1 57.837,55.362 60.362,55.362 C30.2
NetC34_1: C34.1 R40.2 X2.1 | length 23
  Top Layer w0.5: C34.1@63.275,14.15 63.275,11.8 R40.2 ; C34.1 63.425,25.2 68.29,30.065 X2.1
NetC35_1: C35.1 R41.2 X2.2 | length 6.6
  Top Layer w0.5: R41.2 64.6,32.95 C35.1@66.975,32.95 ; C35.1 X2.2@71.05,32.8
NetC36_1: C36.1 R42.2 X2.3 | length 25.9
  Top Layer w0.5: R42.2 64.85,57.25 C36.1@67.175,57.25 ; C36.1 67.175,38.82 X2.3
NetDA1_4: DA1.4 R7.2 R10.2 R13.2 R19.1 | length 26.8
  Top Layer w0.5: DA1.4 25.5,17.55 26.5,17.55 26.883,17.933 26.883,18.788 27.176,19.081 29.05,19.081 R13.2
  Top Layer w0.6: R10.2 R7.2 20.325,24.703 20.826,25.204 27.521,25.204 29.238,23.487 R13.2@29.238,19.29 ; R13.2 R13.2@29.238,19.29 ; R19.1@31.58,19.282 31.572,19.29 R13.2@29.238,19.29
NetDA2_4: DA2.4 R8.2 R11.2 R15.2 R20.1 | length 24.3
  Top Layer w0.5: R11.2 R8.2 19.75,45.2 19.75,46.582 20.043,46.875 26.45,46.875 28.566,44.759 R15.2 27.302,42.302 26.975,41.975 26.975,40.8 26.25,40.075 24.825,40.075 DA2.4
  Top Layer w0.6: R15.2@28.632,42.308 31.135,42.308 R20.1
NetDA3_4: DA3.4 R9.2 R12.2 R17.2 R21.1 | length 23.2
  Top Layer w0.5: R12.2@17.23,69.775 R9.2@19.57,69.775 ; R9.2@19.777,69.827 R9.2@19.85,69.9 ; R9.2@20.125,69.9 20.125,71.307 20.418,71.6 26.103,71.6 28.846,68.857 R17.2 28.784,66.85 27.25,66.85 26.7,66.3 26.7,65.525 26.25,65.075 DA3.4
  Top Layer w0.6: R17.2 R21.1
NetDA4_1: DA4.1 R13.1 R14.1 | length 6.4
  Top Layer w0.5: DA4.1@27.397,12.753 27.397,14.397 27.923,14.923 R14.1 29.316,17.101 R13.1@29.019,17.398
NetDA4_6: DA4.6 DA7.3 | length 3.2
  Top Layer w0.5: DA4.6 35.775,10.04 35.825,9.99 DA7.3
NetDA4_8: DA4.8 R14.2 R19.2 | length 6.3
  Top Layer w0.5: R19.2@31.58,17.382 31.45,17.252 31.45,15.157 R14.2 31.45,14.923 32.452,14.923 32.95,14.425 DA4.8@32.95,12.669
NetDA5_1: DA5.1 R15.1 R16.1 | length 6.2
  Top Layer w0.5: DA5.1 27.078,37.278 27.7,37.9 28.677,37.9 R16.1
  Top Layer w0.6: R15.1 28.647,40.322 28.647,38.031 R16.1
NetDA5_6: DA5.6 DA8.3 | length 3.1
  Top Layer w0.4: DA5.6 34.135,33.015 34.35,32.8 35.175,32.8 DA8.3
NetDA5_8: DA5.8 R16.2 R20.2 | length 6.4
  Top Layer w0.5: R16.2 30.713,37.865 31.735,37.865 32.278,37.322 DA5.8
  Top Layer w0.6: R16.2 30.817,38.139 30.817,40.089 R20.2
NetDA6_1: DA6.1 R17.1 R18.1 | length 6.3
  Top Layer w0.5: DA6.1 27.491,60.179 27.6,60.179 27.6,62.1 27.984,62.484 R18.1@29.027,62.484
  Top Layer w0.6: R17.1 28.968,64.89 28.968,62.542 R18.1@29.027,62.484
NetDA6_6: DA6.6 DA9.3 | length 3
  Top Layer w0.5: DA6.6 35.55,57.589 35.6,57.539 DA9.3
NetDA6_8: DA6.8 R18.2 R21.2 | length 6.3
  Top Layer w0.5: R18.2@31.023,62.516 31.039,62.5 32,62.5 32.641,61.859 DA6.8
  Top Layer w0.6: R18.2@31.023,62.516 31.107,62.6 31.107,64.725 R21.2
NetDA7_1: DA7.1 R25.2 R28.1 | length 5
  Top Layer w0.5: DA7.1 R25.2 42.6,9.775 R28.1
NetDA7_4: DA7.4 R22.1 R25.1 | length 17.4
  Top Layer w0.5: DA7.4 34.793,7.175 34.5,6.882 34.5,3.075 36.075,1.5 39.175,1.5 40.125,2.45 R22.1 40.125,7.775 R25.1
NetDA8_1: DA8.1 R26.2 R29.1 | length 5
  Top Layer w0.5: DA8.1@37.187,32.913 39.612,32.913 R26.2 42.075,32.95 R29.1
NetDA8_4: DA8.4 R23.1 R26.1 | length 18
  Top Layer w0.5: DA8.4 34.375,30.275 33.732,29.632 33.732,25.518 34.45,24.8 39.075,24.8 39.45,25.175 39.45,28.475 R23.1 39.55,30.95 R26.1
NetDA9_1: DA9.1 R27.2 R30.1 | length 5.1
  Top Layer w0.5: DA9.1 37.5,57.425 37.55,57.375 39.825,57.375 R27.2 42.3,57.25 R30.1
NetDA9_4: DA9.4 R24.1 R27.1 | length 18.2
  Top Layer w0.5: DA9.4 34.775,54.9 33.9,54.025 33.9,49.668 34.193,49.375 39.275,49.375 39.8,49.9 39.8,52.825 R24.1 39.85,55.25 R27.1
RA: C2.2 C4.2 X1.1 | length 36.3
  Top Layer w0.5: X1.1 12.575,9.425 C2.2 ; v1(16.725,32.35) 19.6,32.35 C4.2
  Bottom Layer w0.5: X1.1 12.596,12.596 12.596,28.221 v1(16.725,32.35)
"REF +1.65": C39.1 DA4.5 DA5.5 DA6.5 R43.1 R44.2 | length 79.9
  Top Layer w0.5: DA5.5 32.325,31.745 32.375,31.695 v1(32.375,30.177) ; v1(32.381,54.217) 32.381,56.269 32.431,56.319 DA6.5 ; v1(32.625,6.1) 32.625,8.72 32.675,8.77 DA4.5
  Top Layer w1: v1(34.525,69.875) C39.1 36.513,69.888 39.262,69.888 R44.2 39.325,69.85 41.8,69.85 R43.1
  Bottom Layer w1: v1@32.375,54.211 v1(32.375,30.177) 32.375,7.895 32.375,6.35 v1(32.625,6.1) ; v1(32.381,54.217) 32.381,69.314 32.967,69.9 v1@34.525,69.9
RL: C10.2 C11.2 C12.2 DA1.1 DA2.1 DA3.1 R7.1 R8.1 R9.1 X1.3 | length 87.3
  Top Layer w0.4: v1(16.4,35.3) 19.325,38.225 C11.2@19.325,40.6 ; C11.2 19.475,40.6 20.7,40.6 21.025,40.925 21.025,41.75 21.275,42 DA2.1 DA2.1@22.1,42.1 ; C11.2@19.625,41.125 R8.1@19.625,43.175
  Top Layer w0.5: v1(16.35,58.3) 16.35,60.276 19.727,63.653 19.727,65.202 C12.2@20.002,65.477 ; v1(19.325,14.7) 20.075,15.45 C10.2 C10.2@20.325,17.75 ; C12.2 19.727,67.877 R9.1@19.777,67.927 ; R7.1 C10.2@20.325,17.75 ; C12.2@20.35,65.825 20.907,65.825 21.2,66.118 21.2,66.65 21.525,66.975 DA3.1 ; DA1.1@22.841,19.409 21.918,19.409 21.625,19.116 21.625,18.275 21.182,17.832 20.407,17.832 C10.2@20.325,17.75
  Bottom Layer w0.5: X1.3 17.7,14.7 ; v1@16.35,58.273 16.35,35.377 16.4,35.327 v1(16.4,35.3) 17.75,33.95 17.75,14.75 17.7,14.7 ; v1(19.325,14.7) 17.7,14.7
pads on no net: X1.

## Polygon pours and split planes (outlines as drawn)
GND on Bottom Layer "NONET_L-01_P-001" (hatched 45Degree grid 0.508 track 0.203, pour order 3): 1,92.814 79,92.814 79,0.804 1,1.248
GND on Top Layer "NONET_L-01_P-001" (hatched 45Degree grid 0.508 track 0.203, pour order 2): 1,93 79.2,93 79.2,1 1,1

## Keep-outs
Keep-Out Layer:
  the board outline again, w0.1

## Silkscreen, mask and mechanical layers (free items; w line width, h text height)
Top Overlay:
  lines w0.2: 39.6,85.2 42.3,85.2 ; 39.6,89.9 42.4,89.9 ; 39.7,87.6 42.3,87.6
  text "Питание" at 27.4,90.704 h3
  text "GND" at 40.4,90.4 h1.5
  text "+3.3" at 40.3,88.1 h1.5
  text "+5" at 41,85.7 h1.5
  text "Nucleo Suply" at 64.767,75.875 h1.52 r90
  text "ECG" at 75.35,62.842 h10 r90
Top Solder:
  the board outline again, w0.8
Bottom Solder:
  the board outline again, w0.8